# Altium PCB Pneumatics_Board.PcbDoc
Units mil, origin at the board's own origin, x right, y up, seen from the top; angles counter-clockwise.
Board outline 2795 x 1550 mil, 2 copper layers (Top Layer, Bottom Layer); 53 components, 37 nets, 229 pads, 33 vias.
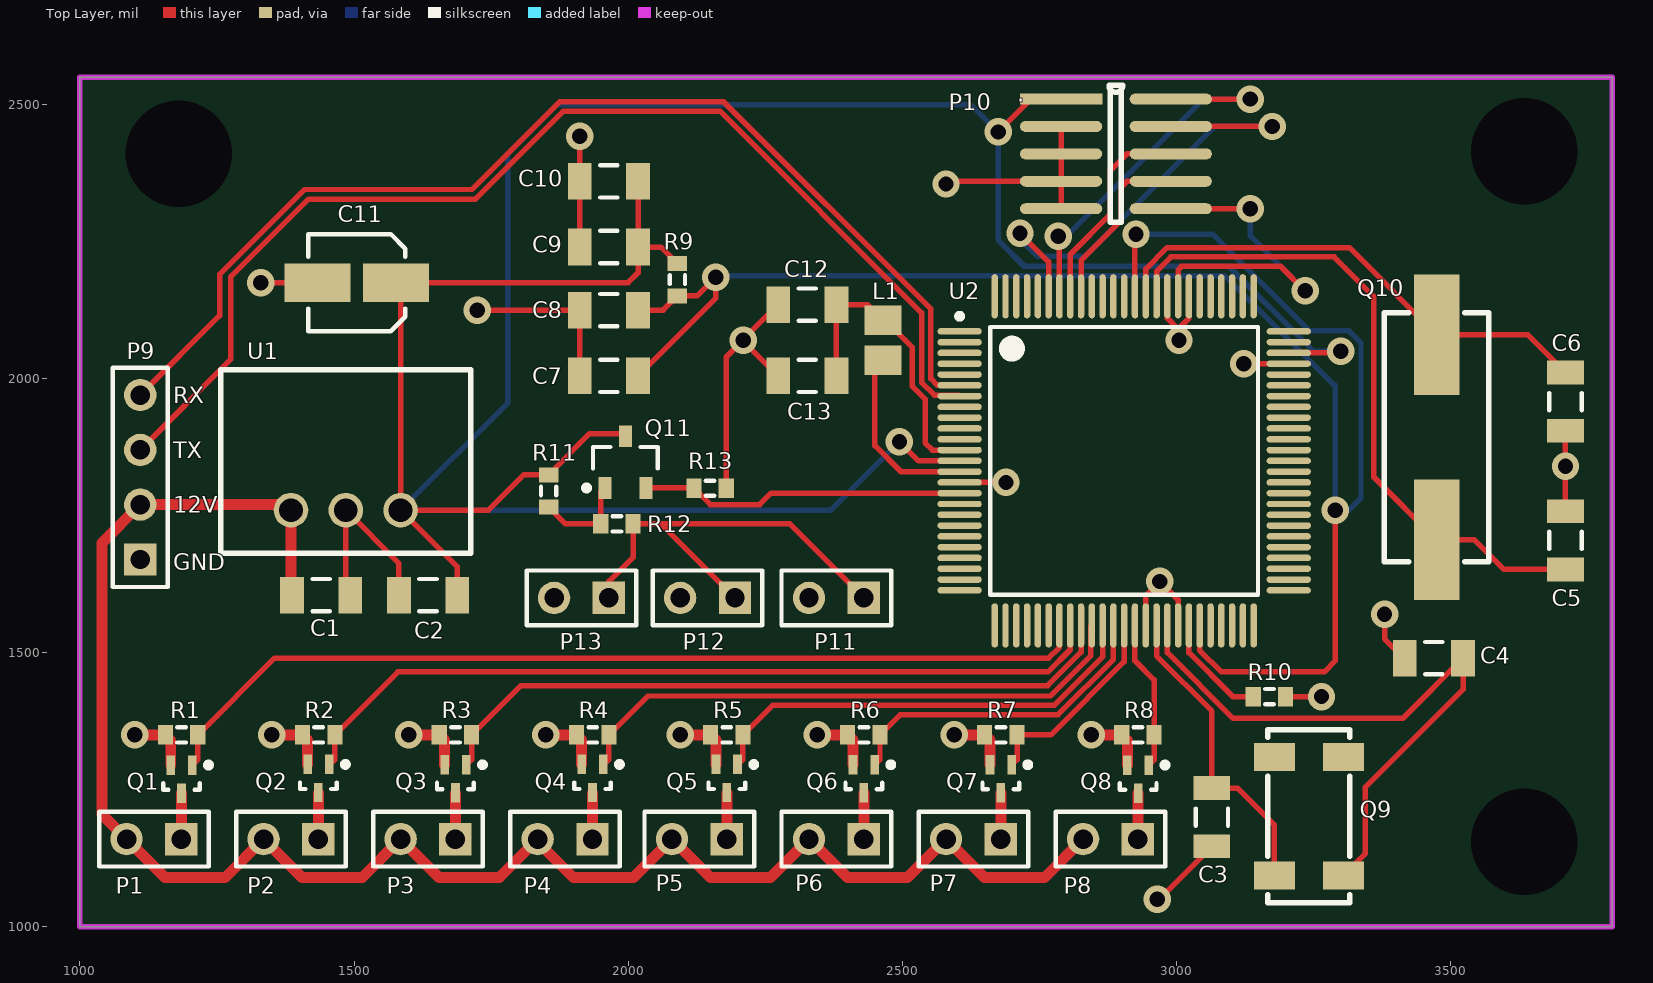
[diagram p0: Top Layer view]
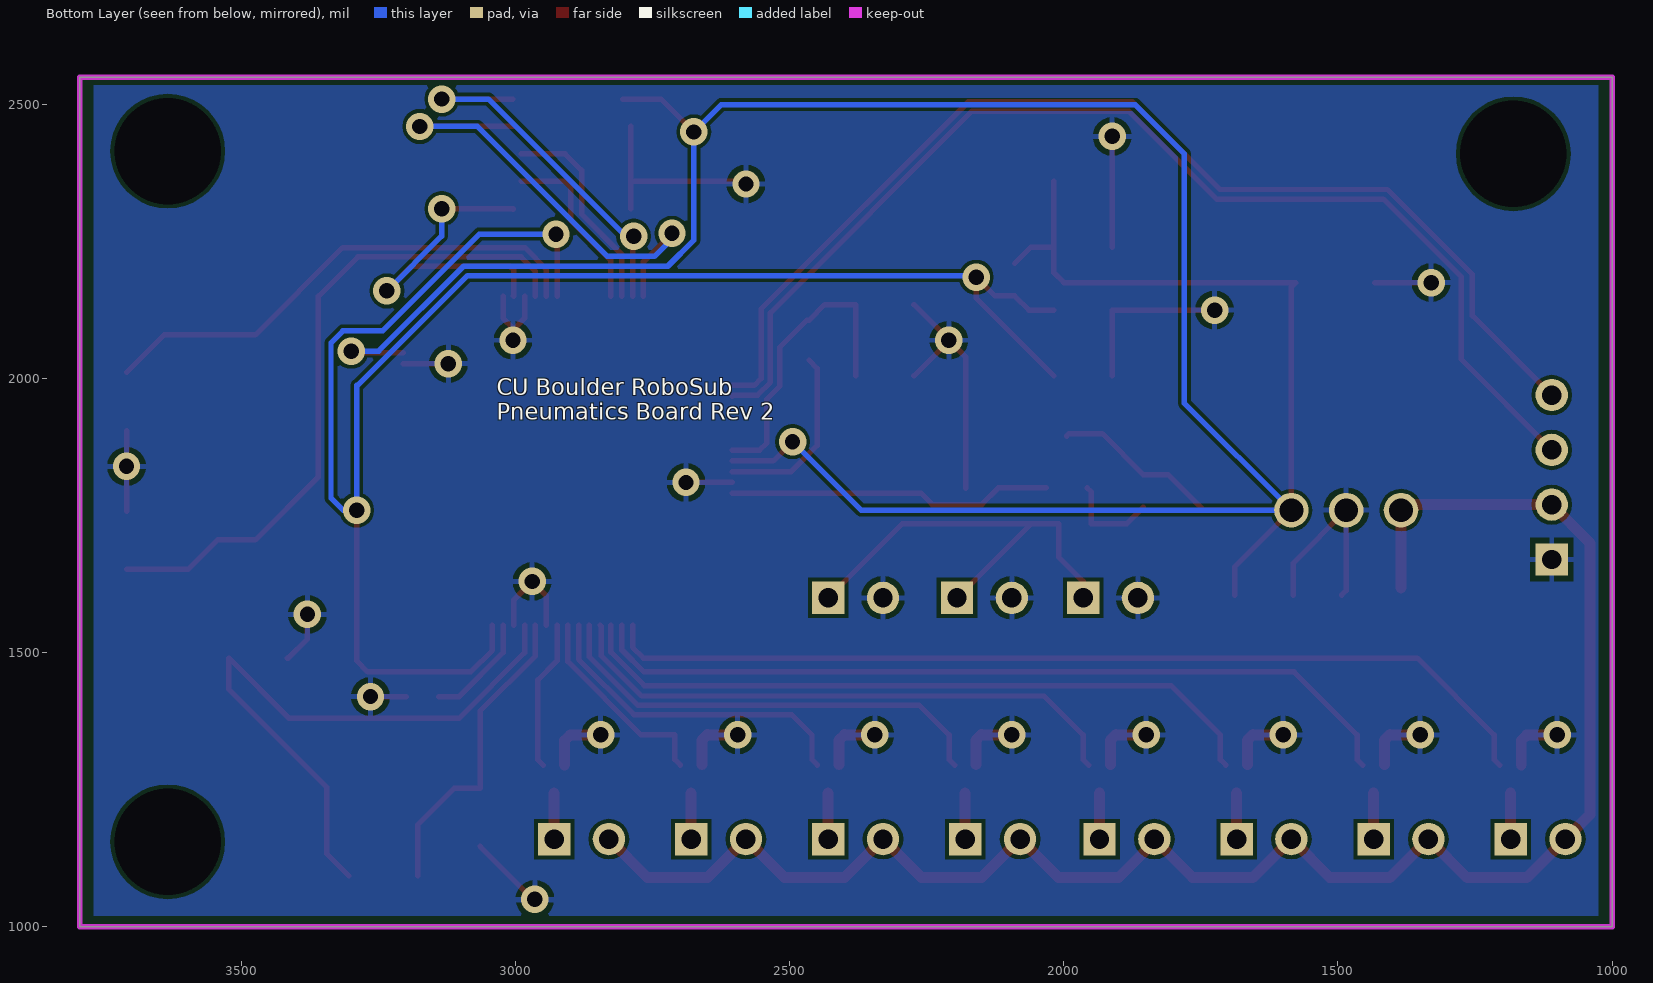
[diagram p1: Bottom Layer view, seen from below]

## Layer stack, top to bottom
Top Solder: solder mask 0.4, Solder Resist, Dk 3.5
Top Layer: signal copper 1.4
Dielectric 1: dielectric 12.6, FR-4, Dk 4.8
Bottom Layer: signal copper 1.4
Bottom Solder: solder mask 0.4, Solder Resist, Dk 3.5

## Board outline
1000,1000 3795,1000 3795,2550 1000,2550

## Design rules (kind name [scope] priority, off if disabled: settings)
Clearance [All] p1: gap=7 ignorepadtopadclearanceinfootprint=FALSE
PolygonConnect [All] p1: connectstyle=Relief reliefconductorwidth=10 reliefentries=4 polygonreliefangle="90 Angle" airgapwidth=10
RoutingVias [All] p1: holewidth=28 width=50 viastyle="Through Hole" minholewidth=28 minwidth=50 maxholewidth=28 maxwidth=50
SolderMaskExpansion [All] p1: expansion=4
Width [All] p1: maxlimit=30 minlimit=10 preferedwidth=10
30 further rules are at their usual default settings.

## Classes and differential pairs
component class Pneumatics_Board_Top: C1 C2 P1 P2 P3 P4 P5 P6 P7 P8 P9 P10 Q1 Q2 Q3 Q4 Q5 Q6 Q7 Q8 R1 R2 R3 R4 R5 R6 R7 R8 U1
component class Embedded_Chip: C3 C4 C5 C6 C7 C8 C9 C10 C11 C12 C13 L1 P11 P12 P13 Q9 Q10 Q11 R9 R10 R11 R12 R13 U2

## Components (designator, comment, footprint, x,y, rotation, side; value= is the part's Value field where it differs from the comment)
C1 "Cap Semi" C1206 1440,1605 r180 top value=10uF
C2 "Cap Semi" C1206 1635,1605 r0 top value=10uF
C3 "Cap Semi" C1206 3065,1200 r90 top value=22pF
C4 "Cap Semi" C1206 3470,1490 r0 top value=22pF
C5 "Cap Semi" C1206 3710,1705 r270 top value=22pF
C6 "Cap Semi" C1206 3710,1958.15 r90 top value=22pF
C7 "Cap Semi" C1206 1965,2005 r180 top value=100nF
C8 "Cap Semi" C1206 1965,2125 r180 top value=100nF
C9 "Cap Semi" C1206 1965,2240 r180 top value=100nF
C10 "Cap Semi" C1206 1965,2360 r180 top value=100nF
C11 "Cap Pol3" CAPAE5043X55M 1505,2175 r180 top value=10uF
C12 "Cap Semi" C1206 2326.85,2135 r0 top value=100nF
C13 "Cap Semi" C1206 2326.85,2005 r0 top value=100nF
L1 "Inductor" "0806 (METRIC 2016)" 2465,2070 r90 top value=4.7uH
P1 "Header 2" HDR1X2 1185,1160 r180 top
P2 "Header 2" HDR1X2 1435,1160 r180 top
P3 "Header 2" HDR1X2 1685,1160 r180 top
P4 "Header 2" HDR1X2 1935,1160 r180 top
P5 "Header 2" HDR1X2 2180,1160 r180 top
P6 "Header 2" HDR1X2 2430,1160 r180 top
P7 "Header 2" HDR1X2 2680,1160 r180 top
P8 "Header 2" HDR1X2 2930,1160 r180 top
P9 "Header 4" HDR1X4 1110,1670 r90 top
P10 "FTSH-105-01-L-DV-K-TR" FTSH-105-01-L-DV-K-TR 2790,2510 r0 top
P11 "Header 2" HDR1X2 2430,1600 r180 top
P12 "Header 2" HDR1X2 2195,1600 r180 top
P13 "Header 2" HDR1X2 1965,1600 r180 top
Q1 "FDY300NZ" FDY300NZ 1185.32,1269.41 r270 top
Q2 "FDY300NZ" FDY300NZ 1435,1270.59 r270 top
Q3 "FDY300NZ" FDY300NZ 1685,1270 r270 top
Q4 "FDY300NZ" FDY300NZ 1935,1270.59 r270 top
Q5 "FDY300NZ" FDY300NZ 2180,1270.59 r270 top
Q6 "FDY300NZ" FDY300NZ 2430,1270 r270 top
Q7 "FDY300NZ" FDY300NZ 2680,1270 r270 top
Q8 "FDY300NZ" FDY300NZ 2930.32,1269.41 r270 top
Q9 "ABS25" ABS25 3305,1093.46 r90 top
Q10 "ABLS" ABLS 3475,2080 r270 top
Q11 "MMBT3906-7-F" MMBT3906-7-F 1995,1847.76 r90 top
R1 "Res3" J1-0603 1185.47,1350 r180 top value=50K
R2 "Res3" J1-0603 1435.47,1350 r180 top value=50K
R3 "Res3" J1-0603 1685,1350 r180 top value=50K
R4 "Res3" J1-0603 1935.47,1350 r180 top value=50K
R5 "Res3" J1-0603 2180,1350 r180 top value=50K
R6 "Res3" J1-0603 2430,1350 r180 top value=50K
R7 "Res3" J1-0603 2680,1350 r180 top value=50K
R8 "Res3" J1-0603 2930,1350 r180 top value=50K
R9 "Res3" J1-0603 2090,2180.47 r90 top value=0
R10 "Res3" J1-0603 3170,1420 r0 top value=91K
R11 "Res3" J1-0603 1855,1795 r90 top value=27K
R12 "Res3" J1-0603 1979.53,1735 r180 top value=1K
R13 "Res3" J1-0603 2149.53,1800 r180 top value=1K
U1 "R-78E3.3-1.0" R-78EXX-1.0 1385,1760 r0 top
U2 "MS432P401R" PZ0100A_M 2905,1850 r0 top value=Value

## Footprints (in the part's own frame and the unit in brackets; to place one, negate y for a bottom-side part, rotate by r counter-clockwise, add the part's x,y. Pads: shape width x height; smd on the part's side, far side on the other; paste and mask are expansions set on the pad)
"0806 (METRIC 2016)" [mm] "Molded Inductor, 2-Leads, Body 2.00x1.60mm, IPC Medium Density"
  rect 1.35x1.7 smd: 1(-0.925,0) 2(0.925,0)
  body extent -1.32,-0.9 1.32,0.9, height 1
ABLS [mm] "SMD Low Profile Crystal - 3.579545 MHz to 75 MHz"
  rect 5.6x2.1 smd: 1(0,0) 2(9.5,0)
  silkscreen extent -1.02,-2.42 10.53,2.42
ABS25 [mm] "32.768 kHz Low Frequency SMD Crystal"
  rect 1.3x1.9 smd: 1(0,0) 2(5.5,0) 3(5.5,3.2) 4(0,3.2)
  silkscreen extent -1.25,-0.3 6.75,3.5
C1206 [mm] "Chip Capacitor, Body 3.2x1.6mm, IPC High Density"
  rect 1.1x1.7 smd: 1(-1.35,0) 2(1.35,0)
  silkscreen extent -0.4,-0.75 0.4,0.75, body extent -1.7,-0.9 1.7,0.9, height 1.3
CAPAE5043X55M [mm] "Aluminum Electrolytic Capacitor, Body 4.30x4.30x5.50mm, IPC Low Density"
  rect 3.05x1.8 smd: 1(-1.825,0) 2(1.825,0)
  silkscreen extent -2.25,-2.25 2.25,2.25, body extent -2.25,-2.25 2.25,2.25, height 5.5
FDY300NZ [mm] "N-Channel 20V 600mA (Ta) 625mW (Ta) Surface Mount SC-89-3"
  rect 0.9x0.4 smd: 1(-0.65,0.5) 2(-0.65,-0.5) 3(0.65,0)
  silkscreen extent -0.77,-0.85 0.49,1.38, body extent -0.49,-0.85 0.49,0.85, height 0.78
FTSH-105-01-L-DV-K-TR [mil] "CONN HEADER 10POS DUAL .05\" SMD"
  rect 150x20 smd: 1(0,0)
  oval 150x20 smd: 2(200,0) 3(0,-50) 4(200,-50) 5(0,-100) 6(200,-100) 7(0,-150) 8(200,-150) 9(0,-200) 10(200,-200)
  silkscreen extent 88,-225 112,25
HDR1X2 [mm] "Connector; Header; 2 Position"
  rect 1.5x1.5 hole 0.9: 1(0,0)
  round 1.5 hole 0.9: 2(2.54,0)
  silkscreen extent -1.27,-1.27 3.81,1.27
HDR1X4 [mm] "Connector; Header; 4 Position"
  rect 1.5x1.5 hole 0.9: 1(0,0)
  round 1.5 hole 0.9: 2(2.54,0) 3(5.08,0) 4(7.62,0)
  silkscreen extent -1.27,-1.27 8.89,1.27
J1-0603 [mm] "Chip Resistor, Body 1.6x0.8mm, IPC High Density"
  rect 0.7x0.9 smd: 1(-0.75,0) 2(0.75,0)
  silkscreen extent -0.2,-0.35 0.2,0.35, body extent -0.85,-0.48 0.85,0.48, height 0.9
MMBT3906-7-F [mm] "SOT23, 3-Leads, Body 2.90x2.45mm, Pitch 0.95mm, IPC Medium Density"
  rect 1x0.6 smd: B(-1.2,0.95) C(1.2,0) E(-1.2,-0.95)
  silkscreen extent -1.32,-1.5 0.7,1.92, body extent -0.7,-1.5 0.7,1.5, height 1.1
PZ0100A_M [mm] "SimpleLink Ultra-Low-Power 32-Bit ARM Cortex-M4F MCU With Precision ADC, 256KB Flash and 64KB RAM"
  oval 2.05x0.3 smd paste+0 mask+0.051: 1(-7.625,6) 2(-7.625,5.5) 3(-7.625,5) 4(-7.625,4.5) 5(-7.625,4) 6(-7.625,3.5) 7(-7.625,3) 8(-7.625,2.5) 9(-7.625,2) 10(-7.625,1.5) 11(-7.625,1) 12(-7.625,0.5) 13(-7.625,0) 14(-7.625,-0.5) 15(-7.625,-1) 16(-7.625,-1.5) 17(-7.625,-2) 18(-7.625,-2.5) 19(-7.625,-3) 20(-7.625,-3.5) 21(-7.625,-4) 22(-7.625,-4.5) 23(-7.625,-5) 24(-7.625,-5.5) 25(-7.625,-6) 51(7.625,-6) 52(7.625,-5.5) 53(7.625,-5) 54(7.625,-4.5) 55(7.625,-4) 56(7.625,-3.5) 57(7.625,-3) 58(7.625,-2.5) 59(7.625,-2) 60(7.625,-1.5) 61(7.625,-1) 62(7.625,-0.5) 63(7.625,0) 64(7.625,0.5) 65(7.625,1) 66(7.625,1.5) 67(7.625,2) 68(7.625,2.5) 69(7.625,3) 70(7.625,3.5) 71(7.625,4) 72(7.625,4.5) 73(7.625,5) 74(7.625,5.5) 75(7.625,6)
  oval 0.3x2.05 smd paste+0 mask+0.051: 26(-6,-7.625) 27(-5.5,-7.625) 28(-5,-7.625) 29(-4.5,-7.625) 30(-4,-7.625) 31(-3.5,-7.625) 32(-3,-7.625) 33(-2.5,-7.625) 34(-2,-7.625) 35(-1.5,-7.625) 36(-1,-7.625) 37(-0.5,-7.625) 38(0,-7.625) 39(0.5,-7.625) 40(1,-7.625) 41(1.5,-7.625) 42(2,-7.625) 43(2.5,-7.625) 44(3,-7.625) 45(3.5,-7.625) 46(4,-7.625) 47(4.5,-7.625) 48(5,-7.625) 49(5.5,-7.625) 50(6,-7.625) 76(6,7.625) 77(5.5,7.625) 78(5,7.625) 79(4.5,7.625) 80(4,7.625) 81(3.5,7.625) 82(3,7.625) 83(2.5,7.625) 84(2,7.625) 85(1.5,7.625) 86(1,7.625) 87(0.5,7.625) 88(0,7.625) 89(-0.5,7.625) 90(-1,7.625) 91(-1.5,7.625) 92(-2,7.625) 93(-2.5,7.625) 94(-3,7.625) 95(-3.5,7.625) 96(-4,7.625) 97(-4.5,7.625) 98(-5,7.625) 99(-5.5,7.625) 100(-6,7.625)
  silkscreen extent -7.75,-6.2 6.2,6.82, body extent -8,-8 8.02,8.02, height 1.5
R-78EXX-1.0 [mm] "1A DC/DC Voltage Converter"
  round 1.6 hole 1.1: 1(0,0) 2(2.54,0) 3(5.08,0)
  silkscreen extent -3.26,-2 8.34,6.5

## Part data
C1 C2 C3 C4 C5 C6 C7 C8 C9 C10 C12 C13: "Capacitor (Semiconductor SIM Model)", LatestRevisionDate=29-May-2009, LatestRevisionNote="IPC-7351 Footprint Added.", PackageDescription="Chip Capacitor", PackageReference=C1206, Published=8-Jun-2000, Publisher="Altium Limited"
C11: "10µF 10V Aluminum Electrolytic Capacitors Radial, Can - SMD 1000 Hrs @ 85°C", Digikey=https://www.digikey.com/product-detail/en/wurth-electronics-inc/865090240001/732-8394-1-ND/5728351
L1: Supplier Part Number 1=732-2956-1-ND, Code_IEC=1005, Code_JEITA=0402, LatestRevisionDate=29-May-2009, LatestRevisionNote="IPC-7351 Footprint Added.", PackageDescription="Chip Inductor", PackageReference=0402-A, Published=8-Jun-2000, Publisher="Altium Limited", Supplier 1=Digi-Key
P1 P2 P3 P4 P5 P6 P7 P8 P11 P12 P13: "Header, 2-Pin", LatestRevisionDate=17-Jul-2002, LatestRevisionNote="Re-released for DXP Platform.", Publisher="Altium Limited"
P9: "Header, 4-Pin", LatestRevisionDate=17-Jul-2002, LatestRevisionNote="Re-released for DXP Platform.", Publisher="Altium Limited"
P10: library part "JTAG Header", "CONN HEADER 10POS DUAL .05\" SMD", Datasheet=http://suddendocs.samtec.com/catalog_english/ftsh_smt.pdf, Digikey Link=https://www.digikey.com/product-detail/en/samtec-inc/FTSH-105-01-L-DV-K-TR/SAM13165CT-ND/8827920, Drawings=http://suddendocs.samtec.com/prints/ftsh-1xx-xx-xxx-dv-xxx-xxx-mkt.pdf
Q1 Q2 Q3 Q4 Q5 Q6 Q7 Q8: "N-Channel 20V 600mA (Ta) 625mW (Ta) Surface Mount SC-89-3", Datasheet=https://www.fairchildsemi.com/datasheets/FD/FDY300NZ.pdf, Digikey=https://www.digikey.com/product-detail/en/on-semiconductor/FDY300NZ/FDY300NZCT-ND/1923099
Q9: "32.768 kHz Low Frequency SMD Crystal", Datasheet=https://abracon.com/Resonators/abs25.pdf
Q10: "SMD Low Profile Crystal - 3.579545 MHz to 75 MHz", Datasheet=https://abracon.com/Resonators/abls.pdf
Q11: "TRANS PNP 40V 0.2A SOT23-3", Datasheet=https://media.digikey.com/pdf/Data%20Sheets/Diodes%20PDFs/MMBT3906.pdf, Digikey=https://www.digikey.com/product-detail/en/diodes-incorporated/MMBT3906-7-F/MMBT3906-FDICT-ND/822858
R1 R2 R3 R4 R5 R6 R7 R8 R9 R10 R11 R12 R13: "Resistor", LatestRevisionDate=29-May-2009, LatestRevisionNote="IPC-7351 Footprint Added.", PackageDescription="Chip Resistor", PackageReference=J1-0603, Published=8-Jun-2000, Publisher="Altium Limited"
U1: library part R-78Exx-1.0, "1A DC/DC Voltage Converter", Datasheet=https://www.recom-power.com/pdf/Innoline/R-78Exx-1.0.pdf, Digikey=https://www.digikey.com/product-detail/en/recom-power/R-78E3.3-1.0/945-2409-5-ND/5327711
U2: library part MS432P401R-IPZR, "SimpleLink Ultra-Low-Power 32-Bit ARM Cortex-M4F MCU With Precision ADC, 256KB Flash and 64KB RAM", Manufacturer="Texas Instruments", PartNumber=XMS432P401RIPZR, CompType=IC, MountType=SMT, PackageReference=PZ0100A, PIN_COUNT=100, RefDes=RefDes, TYPE=TYPE

## Free pads (board coordinates)
  round 60 hole 194 unplated: 0(1180,2410) 0(3635,1155) 0(3635,2415)

## Via types
v1: diameter 50, hole 28, Top Layer to Bottom Layer, 33 vias

## Nets (pads, with @x,y where several pads share a name; then routed paths per layer and width w, separated by ;. In a path a pad name is that pad's centre, name@x,y a point inside that pad or via, vN(x,y) a via of type N, cw(c..) or ccw(c..) an arc to the next point about the centre after c; other vN are vias at no path point)
3V3: C2.2 C9.1 C10.1 C11.1 P10.1 Q11.C R9.2 R11.2 U1.3 U2.13 U2.73 | length 5712.8
  Top Layer w10: C2.2 1688.15,1656.85 U1.3 ; Q11.C 1990.47,1899.53 1930,1899.53 R11.2 1809.53,1824.53 1745,1760 U1.3 ; C10.1 C9.1 ; R9.2 2060,2240 C9.1 ; v1(2495,1885) 2530,1850 U2.13 ; v1(2675,2450) 2735,2510 P10.1 P10.1@2805,2510 ; U2.73 3296.85,2046.85 v1(3300,2050) ; U1.3 1585,2166.85 C11.1 2000,2175 2018.15,2193.15 C9.1
  Bottom Layer w10: v1(2495,1885) 2370,1760 U1.3 1780,1955 1780,2410 1870,2500 2625,2500 v1(2675,2450) 2675,2252.67 2722.67,2205 3095,2205 3250,2050 v1(3300,2050)
12V: C1.2 P1.2 P2.2 P3.2 P4.2 P5.2 P6.2 P7.2 P8.2 P9.2 U1.1 | length 3234.6
  Top Layer w10: U1.1@1375,1770 U1.1
  Top Layer w20: U1.1@1375,1770 P9.2 1040,1700 1040,1205 P1.2 1155,1090 1265,1090 P2.2 1405,1090 1515,1090 P3.2 1655,1090 1765,1090 P4.2@1832.5,1157.5 ; C1.2@1385,1618.15 U1.1 ; P4.2@1830,1160 P4.2@1832.5,1157.5 ; P4.2 P4.2@1832.5,1157.5 ; P8.2 2760,1090 2650,1090 P7.2 2510,1090 2400,1090 P6.2 2260,1090 2150,1090 P5.2 2010,1090 1900,1090 P4.2@1832.5,1157.5
AVCC: C7.1 C8.1 R9.1 U2.45 U2.87 | length 3390.8
  Top Layer w10: C7.1 2160,2146.85 v1(2160,2185) 2125.94,2150.94 R9.1 2064.06,2125 C8.1 ; U2.87 2924.68,2261.76 v1(2926.46,2263.54) ; U2.45 3042.8,1504.29 3082.08,1465 3270,1465 3290,1485 v1(3290,1760)
  Bottom Layer w10: v1@2160,2190 v1(2160,2185) 2163,2188 3087.96,2188 3288.28,1987.67 3290,1987.67 v1(3290,1760) 3315,1760 3337,1782 3337,2065.33 3315.33,2087 3243,2087 3066.46,2263.54 v1(2926.46,2263.54)
DCOR: R10.1 U2.44 | length 200.3
  Top Layer w10: U2.44 3023.11,1499.93 3103.04,1420 R10.1
GND: C1.1 C2.1 C3.1 C4.1 C5.1 C6.1 C7.2 C8.2 C9.2 C10.2 C11.2 C12.1 C13.1 P9.1 P10.3 P10.5 P10.7 P10.9 P11.2 P12.2 P13.2 Q1.2 Q2.2 Q3.2 Q4.2 Q5.2 Q6.2 Q7.2 Q8.2 R1.2 R2.2 R3.2 R4.2 R5.2 R6.2 R7.2 R8.2 R10.2 R13.1 U1.2 U2.15 U2.40 U2.43 U2.72 U2.82 U2.84 | length 3672.6
  Top Layer w10: v1(1330,2175) C11.2 ; C1.1 1485,1613.15 U1.2 1581.85,1663.15 C2.1 ; v1(1725,2125) C8.2 C7.2 ; C9.2 C10.2 v1(1911.85,2441.85) ; R13.1 2179.06,2039.06 v1(2210,2070) ; C13.1 2210,2068.7 v1(2210,2070) ; C12.1 2210,2071.3 v1(2210,2070) ; v1(2580,2355) 2585,2360 P10.7 ; U2.15 v1(2689.37,1810.63) ; P10.9 P10.7 ; P10.3 P10.5 P10.7 ; U2.40 2944.37,1604.37 v1(2970,1630) 3003.43,1596.57 U2.43 ; v1(2965,1050) 2968.15,1050 C3.1 ; U2.84 2983.74,2110.11 v1@3005,2088.85 ; v1(3005,2070) v1@3005,2088.85 ; U2.82 3023.11,2110.11 3005,2092 v1@3005,2088.85 ; v1(3122.83,2027.17) U2.72 ; R10.2 v1(3265,1420) ; v1(3380,1570) 3380,1525 3415,1490 C4.1 ; C5.1 v1(3710,1840) C6.1
  Top Layer w20: v1(1100,1350) R1.2 ; R1.2@1155.47,1350 1165.63,1339.84 Q1.2 ; v1(1350,1350) R2.2 ; R2.2@1405.16,1351.18 1415.31,1341.02 Q2.2 ; v1(1600,1350) R3.2@1655.75,1350 ; R3.2@1655.16,1350.59 R3.2@1655.75,1350 ; R3.2@1655.94,1350 R3.2@1655.75,1350 ; Q3.2 1665.31,1340.43 R3.2@1655.75,1350 ; v1(1850,1350) R4.2 ; R4.2@1905.16,1351.18 1915.31,1341.02 Q4.2 ; v1(2095,1350) R5.2@2150.94,1350 ; R5.2@2150.16,1351.18 2160.31,1341.02 Q5.2 ; v1(2345,1350) R6.2@2400.75,1350 ; R6.2@2400.16,1350.59 R6.2@2400.75,1350 ; R6.2@2400.94,1350 R6.2@2400.75,1350 ; Q6.2 2410.31,1340.43 R6.2@2400.75,1350 ; v1(2595,1350) R7.2@2650.75,1350 ; R7.2@2650.16,1350.59 R7.2@2650.75,1350 ; R7.2@2650.94,1350 R7.2@2650.75,1350 ; Q7.2 2660.31,1340.43 R7.2@2650.75,1350 ; v1(2845,1350) R8.2@2900.94,1350 ; R8.2 2910.63,1339.84 Q8.2
NetC3_2: C3.2 Q9.4 U2.41 | length 572.8
  Top Layer w10: U2.41 2964.06,1494.39 3065,1393.44 C3.2 3111.85,1253.15 3179.02,1185.98 Q9.4
NetC4_2: C4.2 Q9.1 U2.42 | length 1171.4
  Top Layer w10: U2.42 2983.74,1499.93 3103.67,1380 3413.15,1380 C4.2 3523.15,1433.15 3345,1255 3345,1133.46 Q9.1
NetC5_2: C5.2 Q10.2 U2.85 | length 1231.2
  Top Layer w10: U2.85 2964.06,2195.71 2990.34,2222 3288,2222 3360,2150 3360,1820.98 Q10.2 3544.02,1705.98 3598.15,1651.85 C5.2
NetC6_2: C6.2 Q10.1 U2.86 | length 925.9
  Top Layer w10: U2.86 2944.37,2200.07 2983.3,2239 3316,2239 Q10.1 3641.3,2080 C6.2
NetP1_1: P1.1 Q1.3 | length 83.9
  Top Layer w10: P1.1 P1.1@1185.32,1160.32
  Top Layer w20: P1.1@1185.32,1160.32 Q1.3
NetP2_1: P2.1 Q2.3 | length 83.5
  Top Layer w20: P2.1@1435.32,1160.32 Q2.3@1435.32,1243.82
NetP3_1: P3.1 Q3.3 | length 83.5
  Top Layer w20: P3.1@1685.32,1160.32 Q3.3@1685.32,1243.82
NetP4_1: P4.1 Q4.3 | length 83.5
  Top Layer w20: P4.1@1935.32,1160.32 Q4.3@1935.32,1243.82
NetP5_1: P5.1 Q5.3 | length 83.5
  Top Layer w20: P5.1@2180.32,1160.32 Q5.3@2180.32,1243.82
NetP6_1: P6.1 Q6.3 | length 83.5
  Top Layer w20: P6.1@2430.32,1160.32 Q6.3@2430.32,1243.82
NetP7_1: P7.1 Q7.3 | length 83.5
  Top Layer w20: P7.1@2680.32,1160.32 Q7.3@2680.32,1243.82
NetP8_1: P8.1 Q8.3 | length 83.9
  Top Layer w10: Q8.3@2930,1243.5 Q8.3
  Top Layer w20: P8.1@2930.32,1160.32 Q8.3
NetP11_1: P11.1 P12.1 P13.1 R12.1 | length 821
  Top Layer w10: P13.1 1965,1630 2009.06,1674.06 R12.1 2060,1735 ; P12.1 2060,1735 ; P11.1 2295,1735 2060,1735
NetQ11_B: Q11.B R11.1 R12.2 | length 176.3
  Top Layer w10: R11.1 1885.47,1735 R12.2 1950,1792.91 Q11.B
NetQ11_E: Q11.E R13.2 U2.16 | length 593.7
  Top Layer w10: Q11.E 2119.49,1800.51 R13.2 2150,1770 2240,1770 2260.94,1790.94 U2.16
P1.2_UART0_RXD: P9.4 U2.6 | length 2049
  Top Layer w10: P9.4 1255,2115 1255,2190 1410,2345 1715,2345 1875,2505 2174.5,2505 2552.45,2127.05 2552.45,2000.06 2564.72,1987.8 U2.6
P1.3_UART0_TXD: P9.3 U2.7 | length 2128.4
  Top Layer w10: P9.3 1275,2035 1275,2185 1417.33,2327.33 1721.37,2327.33 1882.04,2488 2167.46,2488 2535.45,2120.01 2535.45,1993.02 2558.58,1969.89 2603.02,1969.89 U2.7
P3.0: Q1.1 R1.1 U2.32 | length 1737.3
  Top Layer w10: Q1.1 1215,1305 R1.1 1355,1490 2767.17,1490 2786.89,1509.72 U2.32
P3.1: Q2.1 R2.1 U2.33 | length 1509.5
  Top Layer w10: Q2.1@1455,1295 1465,1305 R2.1 1580,1465 2766.21,1465 2806.57,1505.36 U2.33
P3.2: Q3.1 R3.1 U2.34 | length 1282.2
  Top Layer w10: Q3.1@1704.53,1295 1714.53,1305 R3.1 1804.53,1440 2765.26,1440 2826.26,1501 U2.34
P3.3: Q4.1 R4.1 U2.35 | length 1054
  Top Layer w10: Q4.1@1955,1295 1965,1305 R4.1 2036,1421 2770.3,1421 2844.17,1494.87 2844.17,1548.02 U2.35
P3.4: Q5.1 R5.1 U2.36 | length 831.7
  Top Layer w10: Q5.1@2199.53,1295 2209.53,1305 R5.1 2263.53,1404 2777.34,1404 2865.63,1492.29 U2.36
P3.5: Q6.1 R6.1 U2.37 | length 603.9
  Top Layer w10: Q6.1@2449.53,1295 2459.53,1305 R6.1 2496.53,1387 2784.38,1387 2885.31,1487.93 U2.37
P3.6: Q7.1 R7.1 U2.38 | length 376.2
  Top Layer w10: Q7.1@2699.53,1295 2709.53,1305 R7.1 2771.42,1350 2905,1483.58 U2.38
P3.7: Q8.1 R8.1 U2.39 | length 273.2
  Top Layer w10: U2.39 2924.68,1485.32 2959.53,1450.47 R8.1 2959.53,1304.53 Q8.1
RST: P10.10 U2.83 | length 624.8
  Top Layer w10: U2.83@3004.33,2151.1 U2.83 3003.43,2198.43 3010,2205 3190,2205 v1(3235,2160) ; P10.10@3004.33,2309.33 3005,2310 v1(3135,2310)
  Bottom Layer w10: v1(3135,2310) 3135,2260 v1(3235,2160)
TCK_SWDCLK: P10.4 U2.95 | length 887.9
  Top Layer w10: v1(2715,2265) 2767.2,2212.8 U2.95 ; P10.4@3005,2460 v1(3175,2460)
  Bottom Layer w10: v1(2715,2265) 2715,2255 2747,2223 2833,2223 3070,2460 v1(3175,2460)
TDI: P10.8 U2.92 | length 324.5
  Top Layer w10: U2.92 2826.26,2215.66 2900,2289.4 2900,2350 2910,2360 P10.8
TDO_SWO: P10.6 U2.93 | length 382.6
  Top Layer w10: U2.93 2806.57,2226.57 2880,2300 2880,2380 2910,2410 P10.6
TMS_SWDIO: P10.2 U2.94 | length 694.1
  Top Layer w10: v1(2785,2260) 2786.89,2258.11 U2.94 ; P10.2@3005,2510 v1(3135,2510)
  Bottom Layer w10: v1(2785,2260) 2800,2260 3050,2510 v1(3135,2510)
VCORE: C12.2 C13.2 L1.2 U2.12 | length 553.1
  Top Layer w10: C13.2 C12.2 2436.42,2135 L1.2 2469.18,2106.42 2518.45,2057.14 2518.45,1985.98 2542,1962.43 2542,1882.62 2554.93,1869.69 U2.12
VSW: L1.1 U2.14 | length 336.5
  Top Layer w10: L1.1 2450,2018.58 2450,1877.67 2497.36,1830.32 U2.14
pads on no net: Q9.2 Q9.3 U2.1 U2.2 U2.3 U2.4 U2.5 U2.8 U2.9 U2.10 U2.11 U2.17 U2.18 U2.19 U2.20 U2.21 U2.22 U2.23 U2.24 U2.25 U2.26 U2.27 U2.28 U2.29 U2.30 U2.31 U2.46 U2.47 U2.48 U2.49 U2.50 U2.51 U2.52 U2.53 U2.54 U2.55 U2.56 U2.57 U2.58 U2.59 U2.60 U2.61 U2.62 U2.63 U2.64 U2.65 U2.66 U2.67 U2.68 U2.69 U2.70 U2.71 U2.74 U2.75 U2.76 U2.77 U2.78 U2.79 U2.80 U2.81 U2.88 U2.89 U2.90 U2.91 U2.96 U2.97 U2.98 U2.99 U2.100

## Polygon pours and split planes (outlines as drawn)
GND on Bottom Layer "Bottom Layer Ground Plane" (solid, pour order 2): 3770,1020 3770,2535 1025,2535 1025,1020

## Keep-outs
Keep-Out Layer:
  the board outline again, w10

## Silkscreen, mask and mechanical layers (free items; w line width, h text height)
Top Overlay:
  text "." at 2710,2505 h30
  text "RX" at 1170,1955 h30
  text "TX" at 1170,1855 h30
  text "12V" at 1170,1755 h30
  text "GND" at 1170,1650 h30
Bottom Overlay:
  text "CU Boulder RoboSub / Pneumatics Board Rev 2" at 3035,1925 h30